# EAGLE board 61000311 (EAGLE 5.10)
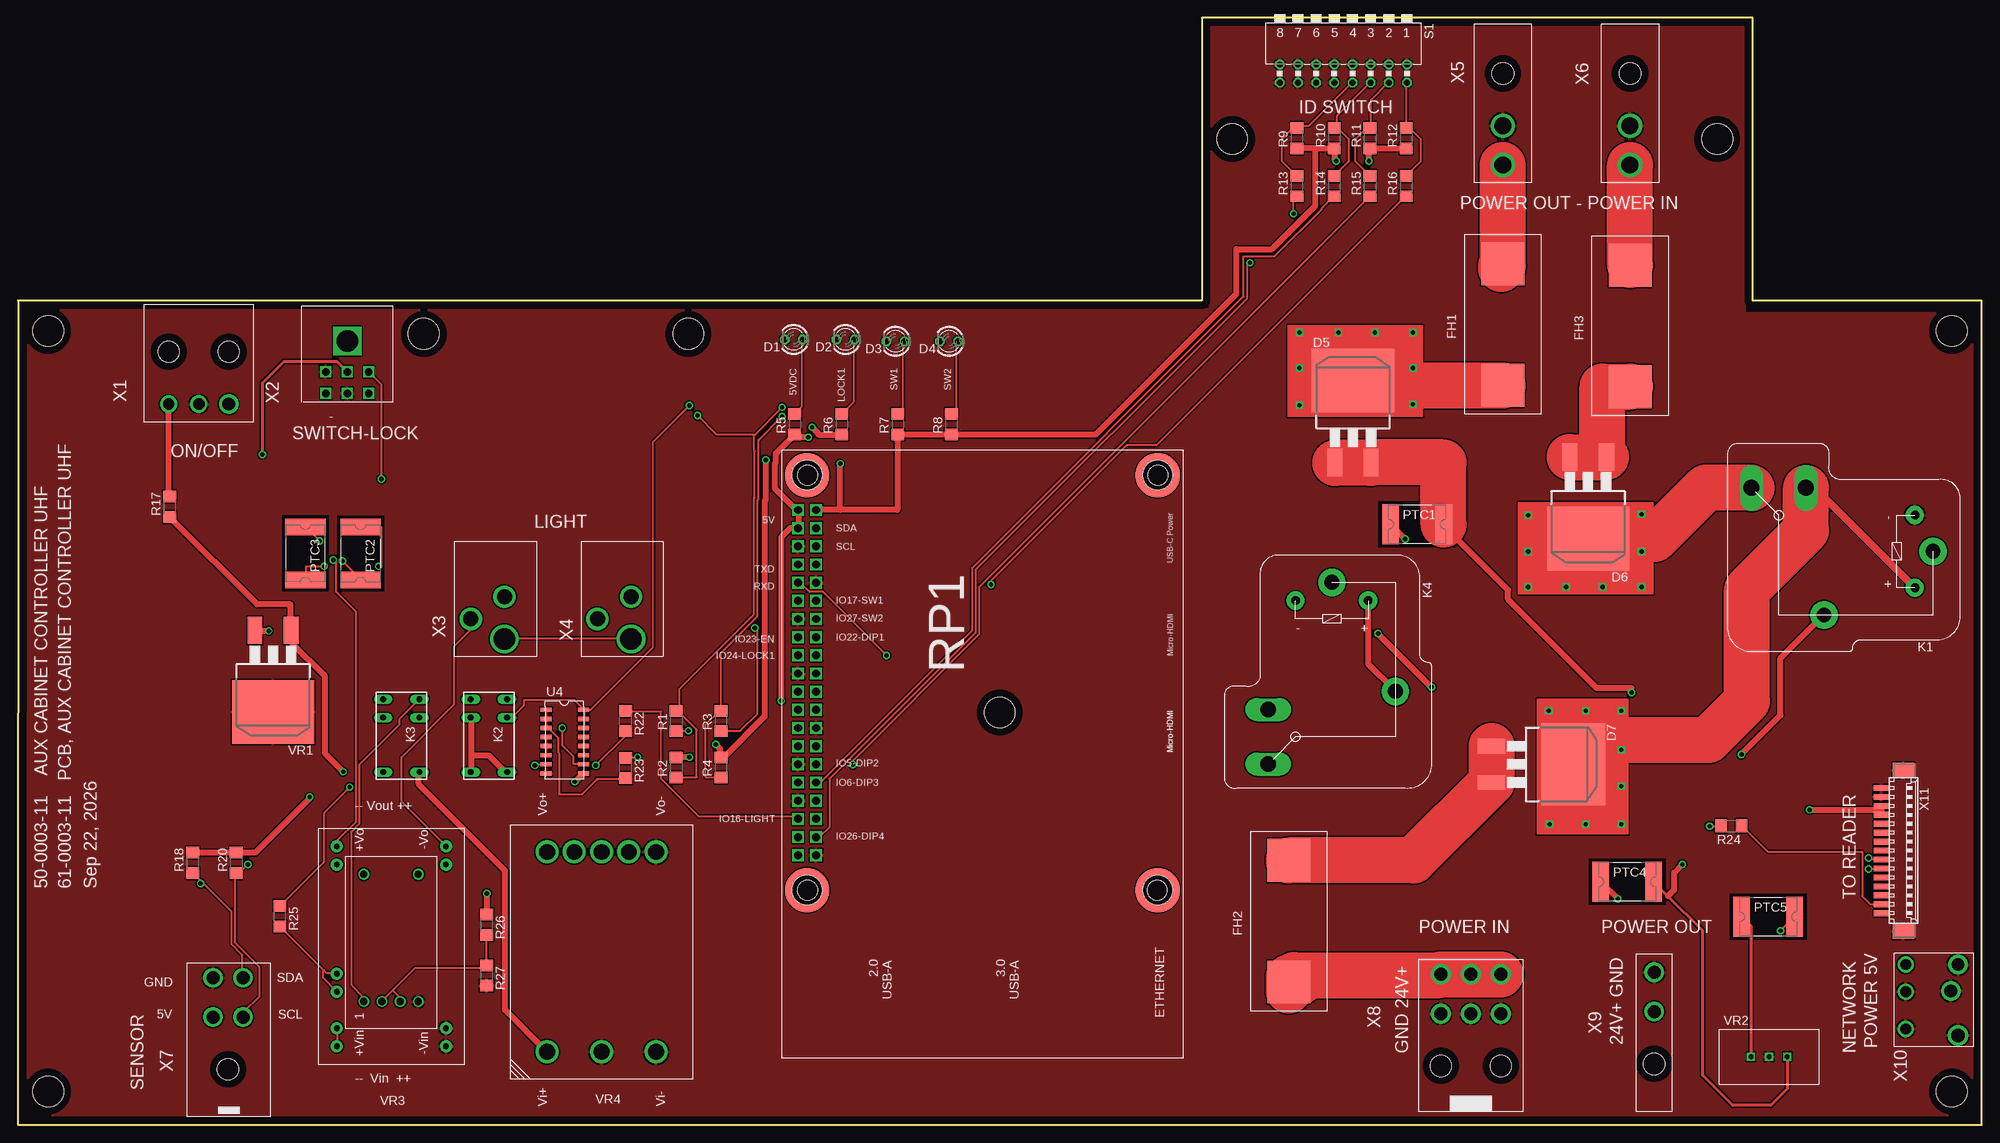
[diagram p0: board, top side]
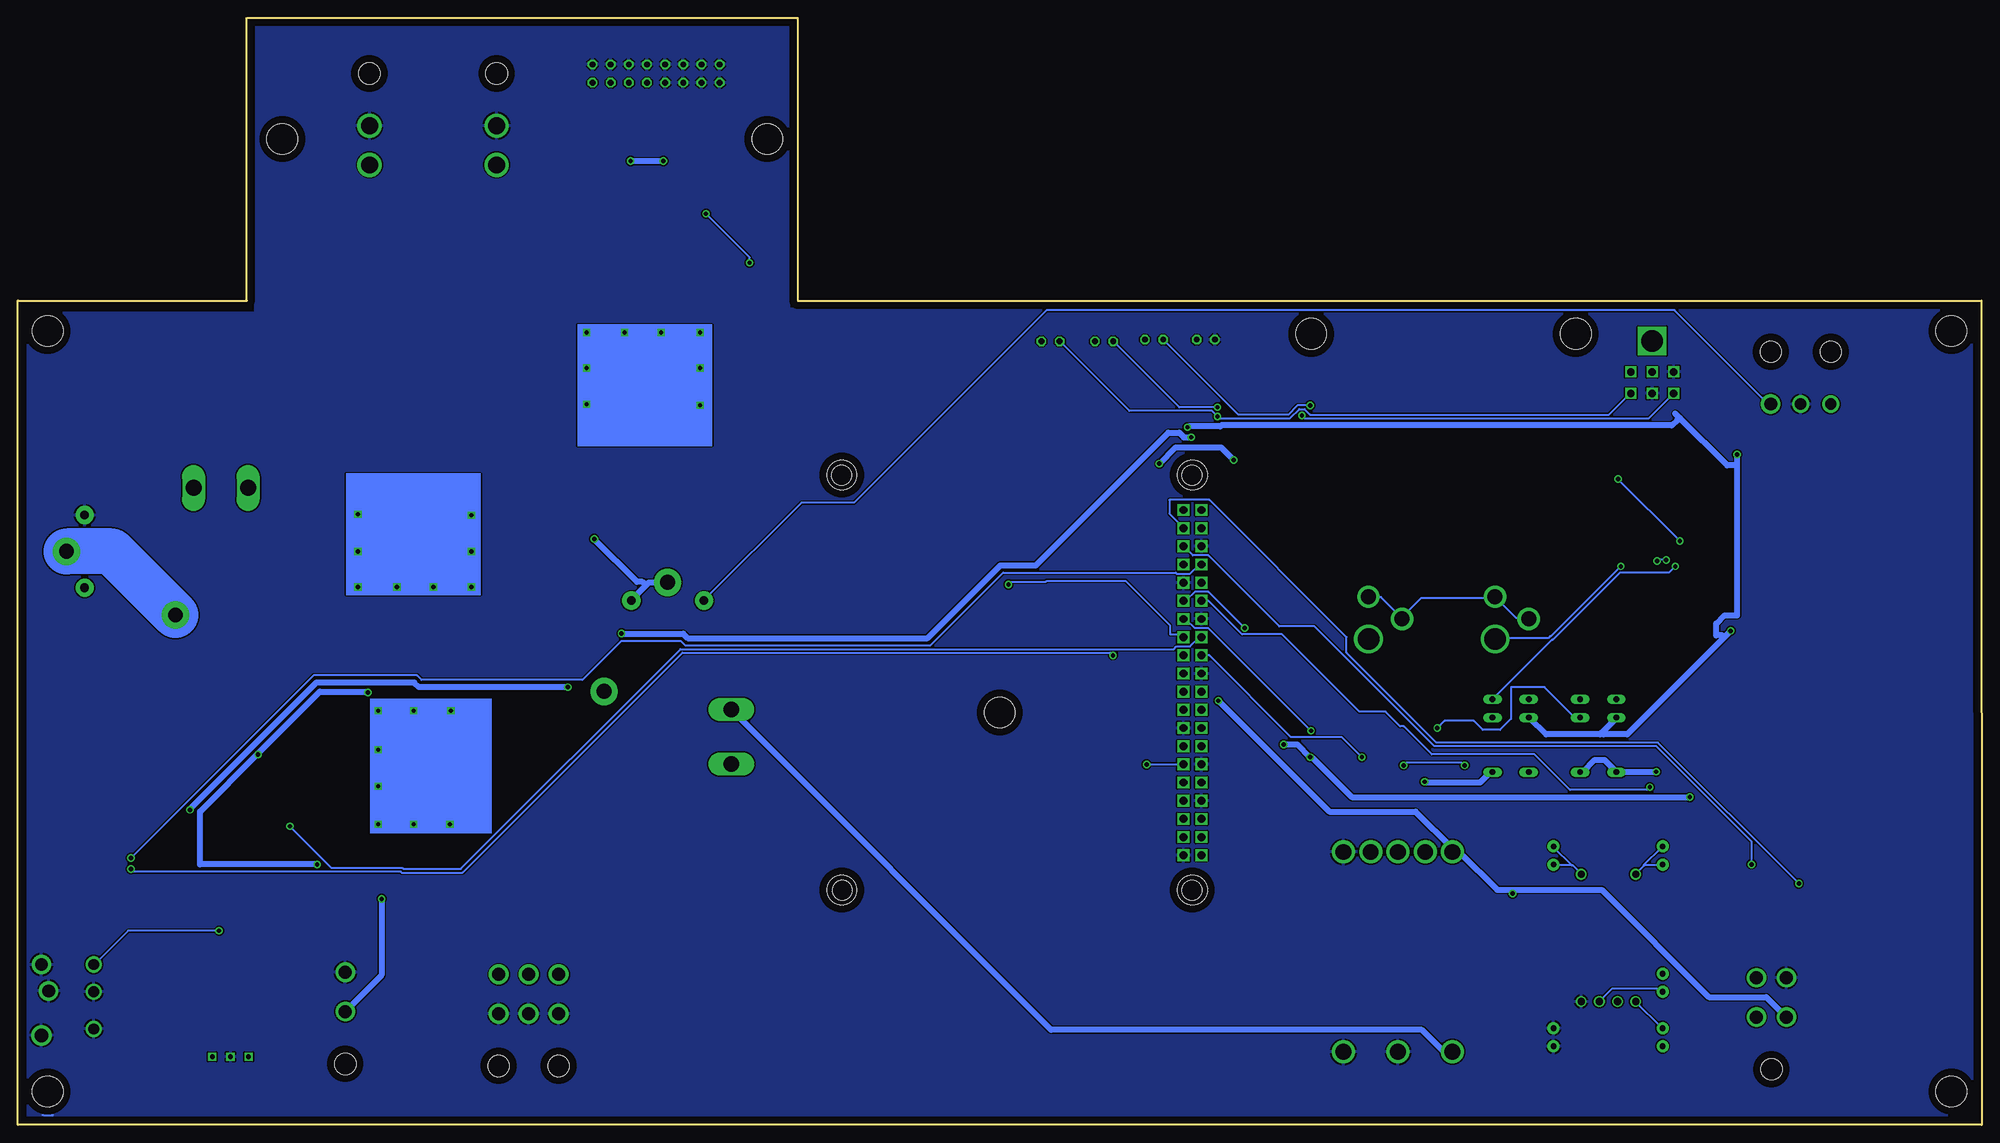
[diagram p1: board, bottom side, seen from below]

Size 274.52 x 154.7 mm. Coordinates in mm from the lower left corner, seen from the top.
Outline: 0.02,115.2 0,0 274.52,0 274.52,115.2 242.52,115.2 242.52,154.7 165.52,154.7 165.52,115.2 0.02,115.2
Copper layers (1*16): Top 0.035mm / dielectric 1.5mm / Bottom 0.035mm
Design rules "default": minimum track width 10mil, minimum drill 24mil, track to track 8mil, track to pad 8mil, pad to pad 8mil, via to via 8mil, smd to smd 8mil, copper to edge 40mil, drill to drill 8mil, minimum pad ring 10mil, minimum via ring 8mil, stop-mask expansion 4mil, vias tented up to drill 0mil, thermal gap 10mil
Net classes: 1 Large Power: width 1.27 mm, drill 2.54 mm, clearance 0.508 mm; 2 Small Power: width 0.813 mm, drill 0.61 mm, clearance 0.381 mm; 3 50 Ohm: width 1.27 mm, drill 2.54 mm, clearance 0.254 mm
Holes 4.32 mm at 270.35,4.65 4.24,4.65 4.24,110.94 270.35,110.94 237.56,137.77 169.74,137.77 137.26,57.6 56.74,110.54 93.74,110.54
Holes 2.8 mm at 159.28,32.8 110.39,32.8 110.39,90.79 159.38,90.79

## Footprints (pad centres in the part's own frame; a part is rotated, then mirrored left to right if it is on the bottom)
MOLEX-CONNHEADER_6POS_MOTORCONTROL = drill 1.016 square: 12V 0,-2.997; DOORINPUT 0,0; GND 2.997,0; LOCKCONTROL -2.997,-2.997; P$3 -2.997,0; P$5 2.997,-2.997 | drill 2.997 square: P$7 0,-7.315
LED3MM = drill 0.813 octagon: A -1.27,0; K 1.27,0
D2PACK = smd 2.083 x 3.81: 1 -2.54,-8.89; 3 2.54,-8.89 | smd 11.43 x 8.89: 2 0,2.54
KHHD010 = drill 2.2 round: P$1 31.75,20.32; P$2 31.75,16.51; P$3 31.75,8.89; P$4 31.75,5.08; P$5 3.81,5.08; P$6 3.81,12.7; P$7 3.81,20.32; P$8 31.75,12.7
945-1132-ND = drill 1 round: P$1 0,0; P$2 0,-2.54; P$3 0,-5.08; P$4 0,-7.62; P$5 17.78,-7.62; P$6 17.78,0 | drill 0.8 pad 1.676 round: P$7 -6.26,3.76; P$8 -3.72,3.76; P$9 -6.26,-11.48; P$10 -3.72,-11.48; P$11 21.68,3.76; P$12 21.68,-11.48; P$13 19.14,-11.48; P$14 19.14,3.76; P$15 1.36,3.76; P$16 3.9,3.76
MINIFIT-3 = drill 1.8 round: P$1 -4.2,0 | drill 1.6 round: P$2 4.2,0; P$3 0,0 | hole 3: 4.2,-7.3; -4.2,-7.3
MEGFIT = drill 2.362 round: P$1 0,0; P$2 0,5.5 | hole 3.048: 0,-7.3
LANCON = drill 1.51 round: P$1 0.9,10.3; P$2 9.9,10.3; P$6 6.1,10.3 | drill 1.81 round: P$3 9.9,3; P$5 6.2,4 | drill 1.91 round: P$4 0,3
LEDCON = drill 3 round: P$1 4.5,13.6 | drill 2.1 round: P$2 9.2,10.8; P$3 4.5,7.7
FUSEHOLDERSMT = smd 6 x 6: 1 -8.5,0; 2 8.5,0
TO90 = drill 1.2 pad 2.54 round: + 3.81,2.54; - 13.97,2.54 | drill 2.2 pad 2.794 long: O 17.78,25.4; S 17.78,17.78 | drill 2.083 pad 3.81 round: P 8.89,0; P1 0,15.24
G5V1 = drill 0.813 long: 1 -5.08,-2.54; 2 -2.54,-2.54; 5 5.08,-2.54; 6 5.08,2.54; 9 -2.54,2.54; 10 -5.08,2.54
2920 = smd 2.3 x 5.6: 1 -3.7,0; 2 3.7,0
R1206 = smd 1.6 x 1.803: 1 -1.422,0; 2 1.422,0
RASPBERRYPI_5 = drill 1.1 square: 3V3 34.12,23.24; 5V 34.12,25.78; GND 29.04,25.78; GPIO0/ID_SD 1.1,23.24; GPIO1/ID_SC 1.1,25.78; GPIO2/SDA 31.58,23.24; GPIO3/SCL 29.04,23.24; GPIO4/GPCLK0 26.5,23.24; GPIO5 -1.44,23.24; GPIO6 -3.98,23.24; GPIO7/CE1 3.64,25.78; GPIO8/CE0 6.18,25.78; GPIO9/MISO 8.72,23.24; GPIO10/MOSI 11.26,23.24; GPIO11/SCLK 6.18,23.24; GPIO12/PWM0 -3.98,25.78; GPIO13/PWM1 -6.52,23.24; GPIO13/TXD 26.5,25.78; GPIO15/RXD 23.96,25.78; GPIO16 -9.06,25.78; GPIO17 21.42,23.24; GPIO18/PCM_CLK 21.42,25.78; GPIO19/PCM_FS -9.06,23.24; GPIO20/PCM_DIN -11.6,25.78; GPIO21/PCM_DOUT -14.14,25.78; GPIO22 16.34,23.24; GPIO23 16.34,25.78; GPIO24 13.8,25.78; GPIO25 8.72,25.78; GPIO26 -11.6,23.24; GPIO27 18.88,23.24; P$4 -6.52,25.78; P$6 -1.44,25.78; P$11 11.26,25.78; P$12 -14.14,23.24; P$19 3.64,23.24; P$24 13.8,23.24; P$27 18.88,25.78; P$32 23.96,23.24; P$35 31.58,25.78 | smd 6.2 x 6.2: P$1 -19,24.5; P$2 39,24.5; P$3 39,-24.5; P$5 -19,-24.5 | hole 4.2: -19,24.5; 39,24.5; 39,-24.5; -19,-24.5
DA-08 = drill 0.813 octagon: 1 -8.89,-1.27; 2 -6.35,-1.27; 3 -3.81,-1.27; 4 -1.27,-1.27; 5 1.27,-1.27; 6 3.81,-1.27; 7 6.35,-1.27; 8 8.89,-1.27; 9 8.89,1.27; 10 6.35,1.27; 11 3.81,1.27; 12 1.27,1.27; 13 -1.27,1.27; 14 -3.81,1.27; 15 -6.35,1.27; 16 -8.89,1.27
SOIC16100MIL = smd 1.55 x 0.6: 1 -2.54,4.318; 2 -2.54,3.048; 3 -2.54,1.778; 4 -2.54,0.508; 5 -2.54,-0.762; 6 -2.54,-2.032; 7 -2.54,-3.302; 8 -2.54,-4.572; 9 2.7,-4.572; 10 2.7,-3.302; 11 2.7,-2.032; 12 2.7,-0.762; 13 2.7,0.508; 14 2.7,1.778; 15 2.7,3.048; 16 2.7,4.318
TSR2-2450 = drill 0.635 square: 5V_OUT 9.525,3.81; GND 6.985,3.81; V_IN 4.445,3.81
MINF2POS = drill 1.829 round: P$1 2.54,2.54; P$2 8.052,2.54 | hole 3.023: 15.342,2.54
MOLEX1040 = drill 1.8 round: P$1 0,0; P$2 -4.2,0; P$3 0,5.5; P$4 -4.2,5.5 | hole 3: -2.1,-7.3
MOLEXPAC1060 = drill 1.829 round: 1 0,0; 2 -4.191,0; 3 -8.382,0; 4 0,5.512; 5 -4.191,5.512; 6 -8.382,5.512 | hole 3.023: -8.382,-7.29; 0,-7.29
53261-15 = smd 0.8 x 2: 1 8.75,-2.5; 2 7.5,-2.5; 3 6.25,-2.5; 4 5,-2.5; 5 3.75,-2.5; 6 2.5,-2.5; 7 1.25,-2.5; 8 0,-2.5; 9 -1.25,-2.5; 10 -2.5,-2.5; 11 -3.75,-2.5; 12 -5,-2.5; 13 -6.25,-2.5; 14 -7.5,-2.5; 15 -8.75,-2.5 | smd 2.1 x 3: S1 11.25,0.625; S2 -11.25,0.625

## Placement (x,y rotation side)
-  [MOLEX-CONNHEADER_6POS_MOTORCONTROL]  46.05,102.22 180 top
D1  [LED3MM]  108.45,109.74 180 top
D2  [LED3MM]  115.69,109.74 180 top
D3  [LED3MM]  122.67,109.49 180 top
D4  [LED3MM]  130.17,109.49 180 top
D5  [D2PACK]  186.65,101.46 0 top
D6  [D2PACK]  219.5,84.44 180 top
D7  [D2PACK]  214.88,50.37 270 top
E$1  [KHHD010]  94.29,6.38 90 top
E$2  [945-1132-ND]  48.36,17.22 90 top
E$3  [MINIFIT-3]  25.28,100.73 180 top
E$4  [MEGFIT]  225.37,139.65 180 top
E$5  [MEGFIT]  207.59,139.65 180 top
E$6  [LANCON]  274.22,12.5 90 top
E$8  [LEDCON]  72.52,81.5 180 top
E$10  [LEDCON]  90.22,81.5 180 top
FH1  FUSEHOLDER5X20MMSMT  [FUSEHOLDERSMT]  207.59,111.86 90 top
FH2  FUSEHOLDER5X20MMSMT  [FUSEHOLDERSMT]  177.68,28.46 90 top
FH3  FUSEHOLDER5X20MMSMT  [FUSEHOLDERSMT]  225.39,111.66 90 top
K1  [TO90]  267.73,71.25 90 top
K2  [G5V1]  65.85,54.38 270 top
K3  [G5V1]  53.6,54.38 270 top
K4  [TO90]  192.57,75.81 180 top
PTC1  [2920]  195.58,83.93 0 top
PTC2  [2920]  47.9,79.85 270 top
PTC3  [2920]  40.2,79.86 270 top
PTC4  [2920]  224.98,33.97 0 top
PTC5  [2920]  244.68,29.07 0 top
R1  1K  [R1206]  92.02,56.44 90 top
R2  10K  [R1206]  92.02,49.94 90 top
R3  1K  [R1206]  98.29,56.44 90 top
R4  10K  [R1206]  98.29,49.94 90 top
R5  [R1206]  108.6,97.89 90 top
R6  [R1206]  115.17,97.89 90 top
R7  [R1206]  123,97.89 90 top
R8  [R1206]  130.5,97.89 90 top
R9  [R1206]  178.79,137.89 90 top
R10  [R1206]  184.01,137.89 90 top
R11  [R1206]  189.01,137.89 90 top
R12  [R1206]  194.07,137.89 90 top
R13  [R1206]  178.79,131.19 90 top
R14  [R1206]  184.01,131.19 90 top
R15  [R1206]  189.01,131.19 90 top
R16  [R1206]  194.07,131.19 90 top
R17  [R1206]  21.2,86.39 90 top
R18  3.9K  [R1206]  24.42,36.64 90 top
R20  3.9K  [R1206]  30.52,36.64 90 top
R22  1K  [R1206]  84.96,56.44 270 top
R23  1K  [R1206]  84.96,49.86 270 top
R24  [R1206]  239.53,41.77 180 top
R25  1K  [R1206]  36.64,29.16 270 top
R26  1K  [R1206]  65.54,27.96 270 top
R27  1K  [R1206]  65.54,20.86 270 top
RP1  [RASPBERRYPI_5]  134.84,51.81 90 top
S1  [DA-08]  185.31,146.92 180 top
U4  [SOIC16100MIL]  76.39,53.68 0 top
VR1  [D2PACK]  35.67,60.24 180 top
VR2  [TSR2-2450]  237.82,5.7 0 top
X1  [MINF2POS]  226.21,23.86 270 top
X3  [MOLEX1040]  31.48,15.05 0 top
X6  [MOLEXPAC1060]  207.31,15.52 0 top
X11  [53261-15]  262.97,38.32 270 top

## Library data of the parts
- RP1 VR2 = Mobile_Aspects_Tester
D1-D4 = led
D5-D7 VR1 = ref-packages
E$1 = omnipower
E$2 = led_driver
E$3 FH1-FH3 K1 K4 U4 X1 X3 X6 = Mobile Aspects 08
E$4 E$5 = megafit
E$6 E$8 E$10 = LedCon
K2 K3 = relay
PTC1-PTC5 = _hhn_PtcFuses_Siba_r500
R1-R18 R20 R22-R27 = rcl
S1 = switch-dil
X11 = con-molex

## Nets
3.3V1 [Small Power]: R2.2 R4.2 R7.1 R8.1 R9.1 R10.1 R11.1 R12.1 R18.2 R20.2 RP1.3V3
5VDC [Small Power]: E$1.P$1 R5.1 R26.1 RP1.5V RP1.P$35 X3.P$2 X11.12 X11.13
12VDC [Small Power]: -.12V K2.2 K2.5 K2.6 K3.2 R6.1 U4.9 VR1.3
24V-TR1 [Small Power]: E$1.P$7 K3.5 K3.6 K4.S R17.1 VR1.1
+24VAUX-IN2 [Small Power]: D5.1 D5.3 K1.P K1.P1 PTC1.2 PTC4.2 VR2.5V_OUT
+24VAUX-IN3 [Small Power]: D7.1 D7.3 FH2.2
+24VAUX-IN4 [Small Power]: D6.2 K1.O
+24VAUX-IN5 [Small Power]: D6.1 D6.3 FH3.1
DGND: -.DOORINPUT -.P$5 D1.K E$1.P$4 E$1.P$5 E$1.P$6 E$2.P$4 E$2.P$9 E$2.P$10 E$3.P$3 E$4.P$1 E$5.P$1 E$6.P$1 E$6.P$3 E$6.P$4 E$6.P$5 E$6.P$6 K1.- R27.2 RP1.GND RP1.P$4 RP1.P$6 RP1.P$11 RP1.P$12 RP1.P$19 RP1.P$27 RP1.P$32 S1.1 S1.2 S1.3 S1.4 S1.5 S1.6 S1.7 S1.8 S1.9 S1.10 S1.11 S1.12 U4.8 VR1.2 VR2.GND X1.P$1 X3.P$4 X6.1 X6.2 X6.3 X11.14 X11.15 X11.S1 X11.S2
DOORSTATUS: -.P$3 D4.K R3.2 R4.1
IO5: R15.1 RP1.GPIO5
IO6: R14.1 RP1.GPIO6
IO22: R16.1 RP1.GPIO22
IO26: R13.1 RP1.GPIO26
LATCHSTATUS: -.GND D3.K R1.2 R2.1
N$42: R23.2 U4.1 U4.2 U4.3
N$43: U4.4 U4.5 U4.6
READER_ENABLE: R24.2 RP1.GPIO23
RXDREADER: RP1.GPIO13/TXD X11.7
S$1: E$2.P$1 E$2.P$7 E$2.P$8 K3.10
S$2: K2.10 PTC3.2
S$3: D3.A R7.2
S$4: D2.A R6.2
S$5: FH2.1 X6.4 X6.5 X6.6
S$6: PTC5.1 VR2.V_IN
S$7: R23.1 RP1.GPIO24
S$8: R12.2 R16.2 S1.16
S$9 [Small Power]: PTC4.1 X1.P$2
S$10: R24.1 X11.2
S$11: D5.2 FH1.1
S$12: R11.2 R15.2 S1.15
S$13: D1.A R5.2
S$14: E$5.P$2 FH1.2
S$15: D4.A R8.2
S$16: E$6.P$2 PTC5.2
S$17: D2.K K2.9 U4.14 U4.15 U4.16
S$18: U4.11 U4.12 U4.13
S$20: R10.2 R14.2 S1.14
S$21: R9.2 R13.2 S1.13
S$22: E$8.P$1 E$10.P$1 PTC2.1
S$23: E$2.P$5 E$2.P$12 E$2.P$13 E$8.P$2 E$8.P$3 E$10.P$2 E$10.P$3
S$24 [Small Power]: K4.+ K4.P K4.P1 PTC1.1
S$25: E$4.P$2 FH3.2
S$26: E$2.P$6 E$2.P$11 E$2.P$14 PTC2.2
S$35: -.LOCKCONTROL PTC3.1
S$36: E$3.P$1 K4.-
S$37: X11.11
S$38: X11.10
S$39: K3.9 U4.10
S$40: E$2.P$2 E$2.P$3 E$2.P$15 E$2.P$16 R25.2 R26.2 R27.1
S$43: R25.1 RP1.GPIO18/PCM_CLK
S$45: D7.2 K1.+ K1.S
S$46: R22.2 U4.7
S$47: R22.1 RP1.GPIO16
S$48: X11.9
S$49: X11.8
S$50: X11.5
S$51: X11.4
S$52: X11.3
S$53: X11.1
S$63 [Small Power]: E$3.P$2 R17.2
SCL-PI: R20.1 RP1.GPIO3/SCL X3.P$1
SDA-PI: R18.1 RP1.GPIO2/SDA X3.P$3
SW1: R3.1 RP1.GPIO17
SW2: R1.1 RP1.GPIO27
TXDREADER: RP1.GPIO15/RXD X11.6

## Tracks (layer width: path | path; a pad name or v marks a point on that pad's centre or on a via)
3.3V1  (via drill 0.61)
  Top 0.813: R12.1 193.95,136.47 189.12,136.47 R11.1 188.87,136.09 v188.87,134.69 | 181.38,136.47 178.84,136.47 R9.1 | 181.38,136.47 183.92,136.47 R10.1 184.04,136.09 184.04,134.95 v184.3,134.69 | R18.2 24.53,38.05 30.5,38.05 R20.2 30.88,38.05 33.17,38.05 40.79,45.67 v40.79,45.79 | v93.87,51.38 92.09,51.38 R2.2 | v97.56,53.16 98.19,52.52 98.19,51.38 R4.2 98.7,51.38 104.41,57.1 104.41,87.2 104.54,87.32 v104.54,92.91 | 114.95,85.92 122.96,85.92 122.96,96.09 R7.1 123.08,96.47 130.45,96.47 R8.1 130.83,96.47 150.64,96.47 170.33,116.15 170.33,122.37 175.28,122.37 181.38,128.47 181.38,136.47 | 114.95,85.92 111.65,85.92 RP1.3V3 | 114.95,85.92 v114.95,92.4
  Bottom 0.813: v97.56,53.16 95.65,53.16 v93.87,51.38 93.49,51.25 88.03,45.79 v40.79,45.79 | v184.3,134.69 v188.87,134.69 | v104.54,92.91 106.32,94.69 112.67,94.69 v114.95,92.4
5VDC  (via drill 0.61)
  Top 0.813: v65.55,32.33 65.55,29.41 R26.1 | v106.7,59.26 106.7,82.12 107.97,83.39 108.73,83.39 RP1.P$35 109.11,83.51 109.11,85.54 RP1.5V 108.99,86.05 108.73,86.05 105.81,88.97 105.81,92.4 105.94,92.53 105.94,93.8 108.48,96.34 R5.1 108.73,96.09 v110.51,96.09 | 260.5,44.02 260.5,44.52 X11.13 | 260.5,44.02 260.5,43.38 X11.12 | v190.14,68.65 v197.63,61.16 | v250.46,44.02 260.5,44.02
  Bottom 0.813: 65.55,32.84 67.71,32.84 72.92,38.05 73.93,38.05 E$1.P$1 73.93,38.55 79.14,43.76 91.21,43.76 v106.7,59.26 | 65.55,32.84 53.11,32.84 38.12,17.85 30.12,17.85 27.32,15.06 X3.P$2 | 65.55,32.84 v65.55,32.33 | v250.46,44.02 250.46,44.14 232.81,61.8 219.09,61.8 218.46,61.16 v197.63,61.16 | v190.14,68.65 181.5,68.65 180.87,68.02 147.34,68.02 137.18,78.18 132.23,78.18 113.69,96.72 112.16,96.72 111.53,96.09 v110.51,96.09
12VDC  (via drill 0.61)
  Top 0.406: -.12V 44.57,106.7 37.22,106.7 34.22,103.7 34.22,93.67 34.22,93.6
  Top 0.813: 63.39,51.64 63.39,56.84 K2.2 | 63.39,51.64 63.39,49.35 K2.5 | v35.07,69.03 33.17,69.03 VR1.3 | v77.87,47.95 79.01,49.1 U4.9 | 63.39,51.64 65.81,51.64 68.09,49.35 68.35,49.35 K2.6 | v34.18,93.67 34.22,93.67 | v111.02,97.48 111.91,96.59 111.91,96.47 115.08,96.47 R6.1
  Bottom 0.813: 53.11,54.81 53.36,54.56 60.85,54.56 63.14,56.84 63.27,56.84 K2.2 | 53.11,54.81 51.07,56.84 K3.2 | v35.07,69.03 35.96,68.14 | 35.96,68.14 49.55,54.56 52.85,54.56 53.11,54.81 | v77.87,47.95 77.74,47.83 70.12,47.83 68.73,49.22 68.47,49.22 K2.6 | 34.18,92.15 34.18,71.19 35.96,71.19 37.1,70.05 37.1,68.4 36.22,68.4 35.96,68.14 | 34.18,92.15 v34.18,93.67 | 42.18,98.75 35.58,92.15 34.18,92.15 | 42.18,98.75 42.82,99.39 | v111.02,97.48 110.89,97.61 106.45,97.61 106.32,97.74 43.33,97.74 42.57,98.5 42.44,98.5 42.18,98.75
24V-TR1  (via drill 0.61)
  Top 0.813: R17.1 21.23,84.91 33.42,72.72 38.12,72.72 38.12,69.16 VR1.1 38.37,68.78 38.37,67.26 42.95,62.68 42.95,51.89 v45.49,49.35 | E$1.P$7 73.93,10.23 68.09,16.07 68.09,35.51 56.03,47.57 56.03,49.22 K3.6
  Bottom 0.813: v45.49,49.35 50.69,49.35 K3.5 51.07,49.35 52.73,51 54.12,51 55.77,49.35 56.03,49.35 K3.6 | K4.S 174.77,57.98 130.07,13.28 78.25,13.28 75.2,10.23 74.06,10.23 E$1.P$7
+24VAUX-IN2  (via drill 0.61)
  Top 0.406: PTC4.2 230.68,31.97 235.52,27.13 235.52,6.9 239.72,2.7 245.02,2.7 247.34,5.03 VR2.5V_OUT
  Top 0.813: 184.13,92.51 D5.1 | v225.57,60.4 225.57,61.03 220.75,61.03 208.3,73.48 208.3,74.75 201.44,81.61 PTC1.2 | v232.68,36.4 231.54,35.25 231.54,32.84 230.78,32.08 230.68,31.97 | v240.94,51.76 246.4,57.22 246.4,65.22 252.37,71.19 K1.P1
  Top 6.452: 184.13,92.51 189.12,92.51 D5.3 199.28,92.57 PTC1.2
  Bottom 0.813: v225.57,60.4 225.57,60.53 232.3,60.53 241,51.83 | 241,51.83 249.07,43.76 249.07,36.4 v232.68,36.4 | 241,51.83 v240.94,51.76
  Bottom 6.452: K1.P 261.38,80.14 K1.P1
+24VAUX-IN3
  Top 6.452: D7.1 D7.3 195.12,36.96 FH2.2
+24VAUX-IN4
  Top 6.452: D6.2 228.82,81.9 236.02,89.1 242.25,89.1 K1.O
+24VAUX-IN5
  Top 6.452: D6.3 221.52,93.33 | 221.52,93.33 D6.1 | FH3.1 221.52,103.16 221.52,93.33
DGND
  Bottom 0.254: 269.61,1.35 269.77,1.34 270.91,1.34 271.09,1.35
  pour Bottom: 1.32,114 166.72,114 166.72,154.3 241.32,154.3 241.32,113.4 273.62,113.4 273.62,1.3 1.32,1.3
  pour Top: 1.32,114 166.72,114 166.72,154.3 241.32,154.3 241.32,113.4 273.62,113.4 273.62,1.3 1.32,1.3
DOORSTATUS  (via drill 0.61)
  Top 0.254: R4.1 98.19,48.59 96.16,48.59 96.16,55.95 97.94,57.73 98.19,57.73 R3.2 98.32,57.98 98.32,65.99 103.4,71.07 103.4,87.32 103.52,87.45 103.52,95.7 v106.83,99.01
  Bottom 0.254: D4.K 128.8,109.42 119.15,99.77 107.59,99.77 v106.83,99.01 106.57,98.75 96.67,98.75 95.4,100.02 94.63,100.02 93.87,99.26 52.09,99.26 49.17,102.18 -.P$3
IO5  (via drill 0.61)
  Top 0.254: v116.73,50.37 116.73,50.87 134.39,68.53 134.39,75.13 189,129.74 R15.1
  Bottom 0.254: v116.73,50.37 111.65,50.37 RP1.GPIO5
IO6
  Top 0.254: R14.1 183.92,129.74 182.27,128.09 182.27,127.96 175.66,121.36 171.34,121.36 171.34,115.77 133.37,77.8 133.37,69.03 112.29,47.95 111.65,47.95 RP1.GPIO6
IO22  (via drill 0.61)
  Top 0.254: v136.04,75.51 136.04,76.02 154.96,94.94 159.15,94.94 193.95,129.74 R16.1
  Bottom 0.254: v136.04,75.51 135.66,75.89 130.83,75.89 130.7,76.02 119.65,76.02 113.43,69.8 113.43,68.53 111.91,68.53 111.65,68.27 RP1.GPIO22
IO26  (via drill 0.61)
  Top 0.254: v178.33,127.33 178.33,129.36 178.71,129.74 R13.1 | v172.23,120.47 171.85,120.09 171.85,115.52 133.88,77.54 133.88,68.78 113.43,48.33 113.43,41.6 112.16,40.33 111.65,40.33 RP1.GPIO26
  Bottom 0.254: v178.33,127.33 172.23,121.23 v172.23,120.47
LATCHSTATUS  (via drill 0.61)
  Top 0.254: R2.1 92.09,48.59 94.89,48.59 94.89,55.19 92.35,57.73 92.09,57.73 R1.2 92.48,57.73 92.48,60.91 102.89,71.32 102.89,87.58 103.02,87.7 103.02,94.18 102.89,94.31 102.89,96.34 102.95,96.4 | 102.95,96.4 v106.83,100.28 | v95.02,99.13 97.68,96.47 102.89,96.47 102.95,96.4
  Bottom 0.254: v106.83,100.28 112.16,100.28 121.3,109.42 D3.K | v95.02,99.13 94.63,98.75 46.5,98.75 43.07,102.18 -.GND
N$42
  Top 0.254: U4.1 73.93,57.98 73.93,56.84 U4.2 73.93,56.72 73.93,55.57 U4.3 74.06,55.57 75.58,54.05 75.58,52.02 75.71,51.89 75.71,46.17 78.89,46.17 80.92,48.21 80.92,48.33 84.86,48.33 R23.2
N$43
  Top 0.254: U4.6 73.93,51.76 73.93,52.91 U4.5 73.93,53.03 73.93,54.18 U4.4
READER_ENABLE  (via drill 0.61)
  Top 0.254: v236.49,41.73 238.02,41.73 R24.2
  Bottom 0.254: v236.49,41.73 230.65,35.89 220.75,35.89 220.62,35.76 212.62,35.76 181.88,66.49 112.92,66.49 112.54,66.88 110.64,66.88 109.37,68.14 109.11,68.14 RP1.GPIO23
RXDREADER  (via drill 0.61)
  Top 0.254: v258.72,37.28 258.72,37.16 260.37,37.16 X11.7
  Bottom 0.254: v258.72,37.28 233.19,62.81 218.71,62.81 218.08,62.18 195.6,62.18 190.14,67.64 181.88,67.64 181.25,67 146.96,67 136.8,77.16 112.67,77.16 112.54,77.03 110.64,77.03 109.37,78.31 109.11,78.31 RP1.GPIO13/TXD
S$1
  Top 0.254: E$2.P$7 44.72,10.99 44.72,13.41 E$2.P$8 | K3.10 56.03,59.38 53.36,56.72 53.36,55.95 47.77,50.37 47.77,42.11 46.63,40.97 46.63,19.5 48.28,17.85 48.28,17.34 E$2.P$1
  Bottom 0.254: E$2.P$8 44.72,13.54 48.41,17.22 E$2.P$1
S$2  (via drill 0.61)
  Top 0.254: v42.82,78.05 40.28,78.05 40.28,76.27 PTC3.2
  Bottom 0.254: v42.82,78.05 43.71,77.16 50.57,77.16 59.96,67.76 60.09,67.76 68.35,59.51 K2.10
S$3
  Top 0.254: R7.2 123.08,99.39 123.72,100.02 123.72,109.29 123.84,109.42 D3.A
S$4
  Top 0.254: R6.2 115.21,99.39 116.86,101.04 116.86,109.67 D2.A
S$5
  Top 6.452: X6.4 X6.5 X6.6 198.8,20.9 178.42,20.9 178.22,20.7 178.22,19.7 177.62,19.1 | 177.62,19.1 177.62,18.8 | 177.62,19.1 177.62,20.6 177.72,20.6 178.12,20.2 179.52,20.2 179.28,19.96 FH2.1
S$6
  Top 0.406: PTC5.1 242.27,27.79 VR2.V_IN
S$7  (via drill 0.61)
  Top 0.254: v86.63,51.38 84.98,51.38 R23.1
  Bottom 0.254: v86.63,51.38 89.43,54.18 96.54,54.18 107.97,65.61 108.99,65.61 RP1.GPIO24
S$8
  Top 0.254: R16.2 194.08,132.66 196.11,134.69 196.11,137.74 194.58,139.26 194.08,139.26 R12.2 194.08,139.39 194.08,145.61 S1.16
S$9  (via drill 0.61)
  Top 0.813: v223.67,31.57 221.38,33.86 PTC4.1
  Bottom 0.813: v223.67,31.57 223.67,20.9 228.75,15.82 X1.P$2
S$10
  Top 0.254: R24.1 241.07,41.73 244.62,38.17 257.83,38.17 257.83,31.95 258.97,30.81 260.37,30.81 X11.2
S$11
  Top 6.452: FH1.1 187.29,103.36 D5.2
S$12
  Top 0.254: R15.2 189,132.66 186.96,134.69 186.96,137.74 188.49,139.26 189,139.26 R11.2 189.12,139.39 189.12,143.2 191.54,145.61 S1.15
S$13
  Top 0.254: R5.2 108.6,99.39 109.62,100.4 109.62,109.67 D1.A
S$14
  Top 6.452: FH1.2 E$5.P$2 | FH1.2 207.59,119.87 207.32,119.6 207.32,120.09 FH1.2
S$15
  Top 0.254: R8.2 130.58,99.39 131.21,100.02 131.21,109.29 131.34,109.42 D4.A
S$16  (via drill 0.61)
  Top 0.254: v246.4,27.12 248.31,29.03 PTC5.2
  Bottom 0.254: v246.4,27.12 259.1,27.12 263.8,22.43 E$6.P$2
S$17  (via drill 0.61)
  Top 0.254: U4.14 79.14,55.57 79.14,56.72 U4.15 79.14,56.84 79.14,57.98 U4.16 | U4.16 79.01,58.11 77.74,59.38 70.76,59.38 70.76,58.62 69.11,56.97 68.47,56.97 K2.9 | v93.87,100.53 88.79,95.45 88.79,66.75 80.03,57.98 79.27,57.98 U4.16
  Bottom 0.254: v93.87,100.53 95.65,100.53 96.92,99.26 103.91,99.26 114.32,109.67 D2.K
S$18
  Top 0.254: U4.11 79.14,51.76 79.14,52.91 U4.12 79.14,53.03 79.14,54.18 U4.13
S$19
  Top 0.254: 181.82,108.7 181.19,108.95
S$20
  Top 0.254: 184.42,139.26 184.04,139.26 R10.2 184.42,139.26 | 184.42,139.26 184.55,139.26 186.08,137.74 186.08,134.69 184.04,132.66 R14.2 | 184.42,139.26 184.42,141.04 189,145.61 S1.14
S$21
  Top 0.254: R13.2 178.71,132.66 176.68,134.69 176.68,137.74 178.2,139.26 178.71,139.26 R9.2 178.84,139.39 178.84,139.65 180.49,139.65 186.46,145.61 S1.13
S$22  (via drill 0.61)
  Top 0.254: v50.44,78.05 50.82,78.43 50.82,83.51 48.03,83.51 PTC2.1 | E$10.P$1 85.62,68.02 68.09,68.02 E$8.P$1
  Bottom 0.254: v50.44,78.05 60.22,68.27 60.35,68.27 60.6,68.02 67.96,68.02 E$8.P$1
S$23
  Top 0.254: E$2.P$12 59.84,38.94 53.61,45.16 53.61,51.38 60.98,58.75 60.98,66.88 63.27,69.16 63.27,70.69 E$8.P$2
  Bottom 0.254: E$10.P$3 85.62,73.73 83.97,73.73 81.05,70.81 E$10.P$2 81.05,70.94 78.38,73.61 67.96,73.61 E$8.P$3 67.96,73.73 65.04,70.81 63.39,70.81 E$8.P$2 | 57.3,36.27 59.84,36.27 E$2.P$13 | 57.3,36.27 57.17,36.27 56.03,35.12 E$2.P$5 | 57.3,36.27 59.84,38.81 E$2.P$12
S$24  (via drill 0.61)
  Top 0.813: v193.95,81.86 191.92,83.89 PTC1.1 | K4.P1 192.55,60.65 188.74,64.46 188.74,73.23 K4.+
  Bottom 0.813: 186.71,75.38 186.33,75.77 183.79,75.77 K4.P | 186.71,75.38 188.74,73.35 K4.+ | v193.95,81.86 187.98,75.89 187.22,75.89 186.71,75.38
S$25
  Top 6.452: E$4.P$2 225.37,120.18 FH3.2
S$26  (via drill 0.61)
  Top 0.254: v45.36,78.81 47.9,76.27 PTC2.2 | v44.09,78.94 44.47,78.56 44.47,74.5 47.26,71.7 47.26,42.36 44.72,39.82 44.72,38.94 E$2.P$11
  Bottom 0.254: 47.2,36.21 47.14,36.27 44.72,36.27 E$2.P$14 | 47.2,36.21 48.28,35.12 E$2.P$6 | E$2.P$11 44.72,38.81 47.26,36.27 47.2,36.21 | v45.36,78.81 45.23,78.94 v44.09,78.94
S$27  (via drill 0.6)
  other vias: 179.15,100.57
S$28  (via drill 0.6)
  other vias: 179.15,105.78
S$29  (via drill 0.6)
  other vias: 179.15,110.73
S$30  (via drill 0.6)
  other vias: 184.61,110.73
S$31  (via drill 0.6)
  other vias: 189.69,110.73
S$32  (via drill 0.6)
  other vias: 195.03,110.73
S$33  (via drill 0.6)
  other vias: 195.03,105.78
S$34  (via drill 0.6)
  other vias: 195.03,100.7
S$35  (via drill 0.61)
  Top 0.254: v50.82,90.24 50.82,103.45 49.17,105.1 -.LOCKCONTROL | v42.18,81.61 40.28,83.51 PTC3.1
  Bottom 0.254: v42.18,81.61 v50.82,90.24
S$36
  Bottom 0.254: K4.- 178.58,73.35 164.99,86.94 157.63,86.94 130.7,113.87 42.95,113.87 29.86,100.78 29.61,100.78 E$3.P$1
S$39  (via drill 0.61)
  Top 0.254: v76.09,55.45 76.09,53.03 77.62,51.51 77.62,50.49 79.01,50.49 U4.10
  Bottom 0.254: v76.09,55.45 75.08,56.46 71.01,56.46 69.74,55.19 67.33,55.19 65.81,56.72 65.81,61.16 61.11,61.16 56.92,56.97 56.15,56.97 K3.9
S$40
  Top 0.254: 42.76,21.6 43.07,21.28 44.6,21.28 44.6,21.15 E$2.P$16 | 42.76,21.6 36.72,27.63 R25.2 | E$2.P$15 44.6,18.61 42.69,20.52 42.69,21.54 42.76,21.6 | R26.2 65.55,26.49 65.55,22.3 R27.1 65.42,22.17 65.42,21.92 55.52,21.92 52.41,18.8 | 52.41,18.8 50.95,17.34 E$2.P$2 | 52.41,18.8 53.36,17.85 53.36,17.34 E$2.P$3
  Bottom 0.254: E$2.P$3 53.36,17.34 51.71,19 45.36,19 44.98,18.61 44.72,18.61 E$2.P$15
S$43  (via drill 0.61)
  Top 0.254: v46.38,47.19 42.82,43.63 42.82,36.78 36.72,30.68 R25.1
  Bottom 0.254: v46.38,47.19 46.76,46.81 57.55,46.81 62.5,51.76 76.85,51.76 80.79,55.7 81.3,55.7 83.33,57.73 87.02,57.73 97.81,68.53 103.4,68.53 108.1,73.23 108.99,73.23 RP1.GPIO18/PCM_CLK
S$45
  Top 1.016: K1.S 251.22,89.03 K1.+
  Top 6.452: K1.S 249.95,83.03 241.72,74.8 241.72,59.2 236.32,53.8 220.85,53.8 D7.2
S$46  (via drill 0.61)
  Top 0.254: v72.28,50.24 72.28,50.37 73.81,50.37 U4.7 | v80.79,50.24 84.86,54.3 84.86,54.94 R22.2
  Bottom 0.254: v72.28,50.24 72.66,50.62 80.41,50.62 v80.79,50.24
S$47
  Top 0.254: R22.1 84.98,57.73 89.94,57.73 89.94,48.33 95.14,43.13 108.99,43.13 108.99,42.87 RP1.GPIO16
S$61
  Top 0.254: 224.96,76.95 224.32,77.2
S$62  (via drill 0.6)
  other vias: 226.99,85.33
S$63
  Top 0.813: R17.2 21.1,87.83 21.1,100.66 E$3.P$2
S$64  (via drill 0.6)
  other vias: 226.99,80.12
S$65  (via drill 0.6)
  other vias: 226.99,75.17
S$66  (via drill 0.6)
  other vias: 221.53,75.17
S$67  (via drill 0.6)
  other vias: 216.45,75.17
S$68  (via drill 0.6)
  other vias: 211.11,75.17
S$69  (via drill 0.6)
  other vias: 211.11,80.12
S$70  (via drill 0.6)
  other vias: 211.11,85.2
S$73
  Top 0.254: 222.12,55.2 222.37,55.84
S$74  (via drill 0.6)
  other vias: 213.99,57.87
S$75  (via drill 0.6)
  other vias: 219.2,57.87
S$76  (via drill 0.6)
  other vias: 224.15,57.87
S$77  (via drill 0.6)
  other vias: 224.15,52.41
S$78  (via drill 0.6)
  other vias: 224.15,47.33
S$79  (via drill 0.6)
  other vias: 224.15,41.99
S$80  (via drill 0.6)
  other vias: 219.2,41.99
S$81  (via drill 0.6)
  other vias: 214.12,41.99
SCL-PI  (via drill 0.61)
  Top 0.254: 30.37,34.62 30.37,25.47 33.8,22.04 33.8,17.98 31.52,15.69 31.52,15.06 X3.P$1 | 30.37,34.62 30.37,35 30.5,35.12 R20.1 30.37,34.62 | 30.37,34.62 v32.15,36.4
  Bottom 0.254: v32.15,36.4 32.15,39.57 45.49,52.91 76.47,52.91 93.24,69.67 98.19,69.67 108.1,79.58 110.26,79.58 111.53,80.84 RP1.GPIO3/SCL
SDA-PI  (via drill 0.61)
  Top 0.254: 25.74,33.92 29.86,29.79 29.86,25.22 31.39,23.7 31.39,20.65 X3.P$3 | 25.74,33.92 24.53,35.12 R18.1 | 25.74,33.92 v25.55,33.73
  Bottom 0.254: v25.55,33.73 45.23,53.41 76.22,53.41 88.79,65.99 88.79,68.14 107.97,87.32 113.56,87.32 113.56,85.42 111.65,83.51 RP1.GPIO2/SDA
SW1  (via drill 0.61)
  Top 0.254: v103.02,69.42 103.4,69.03 103.4,57.48 100.98,55.06 98.32,55.06 R3.1
  Bottom 0.254: v103.02,69.42 108.1,74.5 110,74.5 111.14,73.35 111.53,73.35 RP1.GPIO17
SW2  (via drill 0.61)
  Top 0.254: v93.75,55.06 92.09,55.06 R1.1
  Bottom 0.254: v93.75,55.06 108.1,69.42 110,69.42 111.27,70.69 111.53,70.69 RP1.GPIO27
TXDREADER  (via drill 0.61)
  Top 0.254: v258.72,35.76 260.37,35.76 X11.6 | v121.43,65.61 112.54,74.5 110.64,74.5 109.37,75.77 109.11,75.77 RP1.GPIO15/RXD
  Bottom 0.254: v258.72,35.76 258.34,35.38 221,35.38 220.87,35.25 212.36,35.25 181.63,65.99 121.81,65.99 v121.43,65.61
(copper drawn outside any net)
  shapes: Bottom area x3, Top area x3

## Text on the board
tNames: X5 | X6 | ID SWITCH | POWER OUT - POWER IN | 5VDC | LOCK1 | SW1 | SW2 | X1 | X2 | SWITCH-LOCK | ON/OFF | 5V | LIGHT | SDA | SCL | TXD | RXD | IO17-SW1 | IO27-SW2 | X3 | IO23-EN | X4 | IO22-DIP1 | IO24-LOCK1 | IO5-DIP2 | IO6-DIP3 | IO16-LIGHT | IO26-DIP4 | 50-0003-11 AUX CABINET CONTROLLER UHF | 61-0003-11 PCB, AUX CABINET CONTROLLER UHF | Sep 22, 2026 | TO READER | POWER IN | POWER OUT | GND 24V+ | 24V+ GND | SDA | GND | 5V | SCL | X8 | X9 | NETWORK | POWER 5V | X7 | X10 | SENSOR | VR3 | VR4